# EAGLE board ONLY_HBRIDGE (v5 (EAGLE 9.7.0)
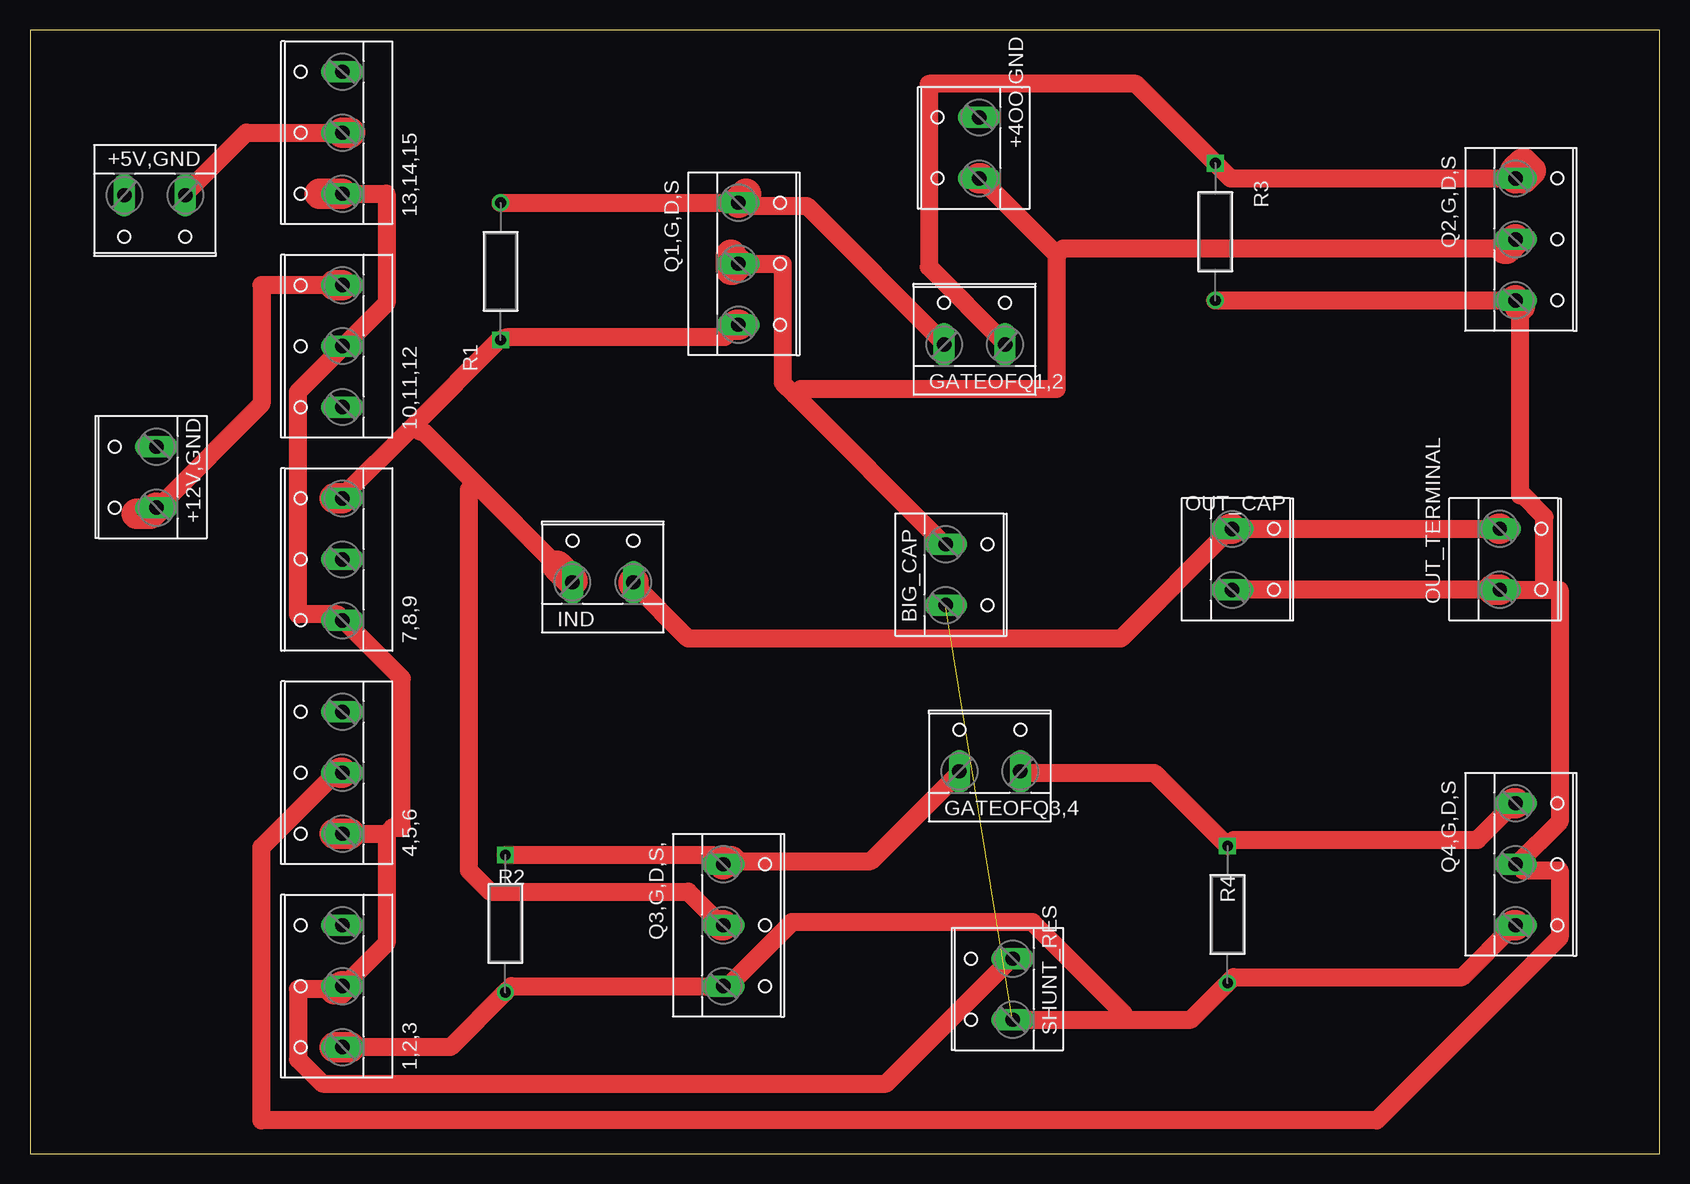
[diagram p0: board, top side]

Size 135.87 x 93.65 mm. Coordinates in mm from the lower left corner, seen from the top.
Outline: 0,0 135.87,0 135.87,93.65 0,93.65 0,0
Copper layers (1*16): Top / Bottom
Stack-up Default Layer Stack: Top User Defined 0.035mm / Dielectric-1 User Defined 1.5mm / Bottom User Defined 0.035mm
Design rules: minimum copper width 1.5mm, minimum drill size 0.35mm, copper clearance wire_polygon to wire_polygon 0.5mm, copper clearance wire_polygon to pad_smd 40mil, copper clearance wire_polygon to via 6mil, copper clearance pad_smd to pad_smd 6mil, copper clearance pad_smd to via 6mil, copper clearance via to via 6mil, copper clearance smd to pad (same net) 6mil, copper clearance smd to via (same net) 6mil, copper clearance smd to smd (same net) 6mil, dimension clearance 40mil, via restrict clearance 0mil, restrict clearance 0mil, drill distance 6mil, keepout clearance 0mil

## Footprints (pad centres in the part's own frame; a part is rotated, then mirrored left to right if it is on the bottom)
W237-133 = drill 1.194 long: 1 -5.08,-0.635; 2 0,-0.635; 3 5.08,-0.635
W237-132 = drill 1.194 long: 1 -2.54,-0.635; 2 2.54,-0.635
STA_CF14_STP = drill 0.889 pad 1.397 square: 1 0,0 | drill 0.889 pad 1.397: 2 11.43,0

## Placement (x,y rotation side)
1,2,3  [W237-133]  25.4,13.97 90 top
4,5,6  [W237-133]  25.4,31.75 90 top
7,8,9  [W237-133]  25.4,49.53 90 top
10,11,12  [W237-133]  25.4,67.31 90 top
13,14,15  [W237-133]  25.4,85.09 90 top
+4OO,GND  [W237-132]  78.49,83.82 90 top
+5V,GND  [W237-132]  10.41,79.25 180 top
+12V,GND  [W237-132]  9.91,56.39 90 top
BIG_CAP  [W237-132]  76.96,48.26 270 top
GATEOFQ1,2  [W237-132]  78.74,68.07 0 top
GATEOFQ3,4  [W237-132]  80.01,32.51 0 top
IND  [W237-132]  47.75,48.26 0 top
OUT_CAP  [W237-132]  100.84,49.53 270 top
OUT_TERMINAL  [W237-132]  123.15,49.54 270 top
Q1,G,D,S  [W237-133]  59.69,74.17 270 top
Q2,G,D,S  [W237-133]  124.46,76.2 270 top
Q3,G,D,S,  [W237-133]  58.42,19.05 270 top
Q4,G,D,S  [W237-133]  124.46,24.13 270 top
R1  CF14JT10K0STA_CF14_STP  [STA_CF14_STP]  39.23,67.82 90 top
R2  CF14JT10K0STA_CF14_STP  [STA_CF14_STP]  39.62,24.89 270 top
R3  CF14JT10K0STA_CF14_STP  [STA_CF14_STP]  98.81,82.55 270 top
R4  CF14JT10K0STA_CF14_STP  [STA_CF14_STP]  99.82,25.65 270 top
SHUNT_RES  [W237-132]  81.28,13.72 90 top

## Library data of the parts
1,2,3 4,5,6 7,8,9 10,11,12 13,14,15 +4OO,GND +5V,GND +12V,GND BIG_CAP GATEOFQ1,2 GATEOFQ3,4 IND OUT_CAP OUT_TERMINAL Q1,G,D,S Q2,G,D,S Q3,G,D,S, Q4,G,D,S SHUNT_RES = con-wago-508
R1-R4 = 2024-12-04_14-13-54_Library; COPYRIGHT: Copyright (C) 2024 Ultra Librarian. All rights reserved.; MANUFACTURER_PART_NUMBER: CF14JT10K0; MFR_NAME: Stackpole International

## Nets
N$1: GATEOFQ1,2.1 Q1,G,D,S.1 R1.2
N$2: GATEOFQ1,2.2 Q2,G,D,S.1 R3.1
N$3: 1,2,3.2 4,5,6.1 7,8,9.1 10,11,12.2 13,14,15.1 SHUNT_RES.2
N$4: GATEOFQ3,4.2 Q4,G,D,S.1 R4.1
N$5: GATEOFQ3,4.1 Q3,G,D,S,.1 R2.1
N$6: 1,2,3.1 BIG_CAP.2 Q3,G,D,S,.3 Q4,G,D,S.3 R2.2 R4.2 SHUNT_RES.1
N$7: 13,14,15.2 +5V,GND.1
N$8: 10,11,12.3 +12V,GND.1
N$9: +4OO,GND.1 BIG_CAP.1 Q1,G,D,S.2 Q2,G,D,S.2
N$10: 7,8,9.3 IND.1 Q1,G,D,S.3 Q3,G,D,S,.2 R1.1
N$11: IND.2 OUT_CAP.1 OUT_TERMINAL.1
N$12: 4,5,6.2 OUT_CAP.2 OUT_TERMINAL.2 Q2,G,D,S.3 Q4,G,D,S.2 R3.2

## Tracks (layer width: path | path; a pad name or v marks a point on that pad's centre or on a via)
N$1
  Top 1.5: R1.2 Q1,G,D,S.1 59.69,78.99 64.77,78.99 76.2,67.56 GATEOFQ1,2.1
  Top 2.54: Q1,G,D,S.1 59.05,79.38 59.69,80.01
N$2
  Top 1.5: Q2,G,D,S.1 100.08,81.28 R3.1 92.2,89.15 74.93,89.15 74.93,73.91 81.28,67.56 GATEOFQ1,2.2
  Top 2.54: Q2,G,D,S.1 123.83,81.91 124.46,82.55 125.09,81.91 124.46,81.28
N$3
  Top 1.5: 13,14,15.1 29.72,80.01 29.72,70.87 26.16,67.31 10,11,12.2 25.65,66.8 22.35,63.5 22.35,44.96 25.65,44.96 7,8,9.1 26.16,44.45 30.99,39.62 30.99,27.18 30.23,27.18 29.72,26.67 | 29.72,26.67 29.72,17.53 26.16,13.97 1,2,3.2 | 26.67,26.67 29.72,26.67 | 25.4,13.72 22.35,13.72 22.35,7.87 24.38,5.84 71.37,5.84 81.79,16.26 SHUNT_RES.2
  Top 2.54: 13,14,15.1 24.13,80.01 | 25.4,26.67 4,5,6.1 26.67,26.67 | 1,2,3.2 25.78,13.72 25.4,13.72
N$4
  Top 1.5: GATEOFQ3,4.2 82.55,31.75 93.73,31.75 R4.1 100.33,26.16 120.65,26.16 123.7,29.21
  Top 2.54: Q4,G,D,S.1 123.7,29.21
N$5
  Top 1.5: R2.1 56.9,24.89 57.66,24.13 Q3,G,D,S,.1 | 58.42,24.38 70.1,24.38 77.47,31.75 GATEOFQ3,4.1
  Top 2.54: Q3,G,D,S,.1 58.04,24.38 58.42,24.38
N$6  (1 unrouted)
  Top 1.5: 26.67,8.89 35.05,8.89 R2.2 40.13,13.97 Q3,G,D,S,.3 58.42,14.22 63.5,19.3 83.57,19.3 91.19,11.68 91.19,11.18 | SHUNT_RES.1 91.19,11.18 | 91.19,11.18 96.77,11.18 R4.2 100.33,14.73 119.38,14.73 123.7,19.05
  Top 2.54: 25.4,8.89 1,2,3.1 26.67,8.89 | Q4,G,D,S.3 123.7,19.05
N$7
  Top 1.5: 13,14,15.2 18.03,85.09 12.95,80.01 +5V,GND.1
  Top 2.54: 13,14,15.2 26.67,85.09
N$8
  Top 1.5: 25.4,72.39 19.3,72.39 19.3,62.48 10.67,53.85 +12V,GND.1
  Top 2.54: +12V,GND.1 10.03,53.34 8.89,53.34 | 10,11,12.3 25.4,72.39
N$9
  Top 1.5: 63.75,63.25 62.74,64.26 62.74,74.17 Q1,G,D,S.2 | 63.75,63.25 76.2,50.8 BIG_CAP.1 | 79.25,81.28 85.6,74.93 | 85.6,74.93 85.6,63.75 64.26,63.75 63.75,63.25 | 122.94,75.44 86.11,75.44 85.6,74.93
  Top 2.54: Q1,G,D,S.2 58.55,73.66 58.42,73.66 58.42,74.93 | +4OO,GND.1 79.25,81.28 | Q2,G,D,S.2 123.06,75.44 122.94,75.44
N$10
  Top 1.5: 32,60.71 25.91,54.61 7,8,9.3 | 32,60.71 39.12,67.82 R1.1 39.88,68.07 57.91,68.07 58.93,69.09 | 37.08,55.88 32.77,60.2 32.51,60.2 32,60.71 | 37.08,55.88 43.94,49.02 | 45.21,47.75 IND.1 | 57.66,19.05 54.86,21.84 38.35,21.84 36.58,23.62 36.58,55.37 37.08,55.88
  Top 2.54: 7,8,9.3 25.4,54.61 | Q3,G,D,S,.2 57.66,19.05 | 43.94,49.02 45.21,47.75 | Q1,G,D,S.3 58.93,69.09
N$11
  Top 1.5: 50.29,47.5 54.86,42.93 90.93,42.93 100.08,52.07 | OUT_CAP.1 122.43,52.07
  Top 2.54: IND.2 50.29,47.5 | OUT_CAP.1 100.08,52.07 | OUT_TERMINAL.1 122.43,52.07
N$12
  Top 1.5: R3.2 Q2,G,D,S.3 | 126.24,46.99 122.68,46.99 OUT_TERMINAL.2 | 126.24,46.99 127.51,46.99 127.51,27.69 123.95,24.13 Q4,G,D,S.2 124.46,23.62 127.51,23.62 127.51,18.03 112.27,2.79 19.3,2.79 19.3,25.55 25.5,31.75 25.91,31.75 | 121.92,46.99 OUT_CAP.2 | 124.21,70.61 124.21,54.86 124.46,54.86 126.24,53.09 126.24,46.99
  Top 2.54: 25.91,31.75 4,5,6.2 | OUT_TERMINAL.2 121.92,46.99 | Q2,G,D,S.3 124.21,70.74 124.21,70.61